# EAGLE board LinCorrector2 (EAGLE 7.4.0)
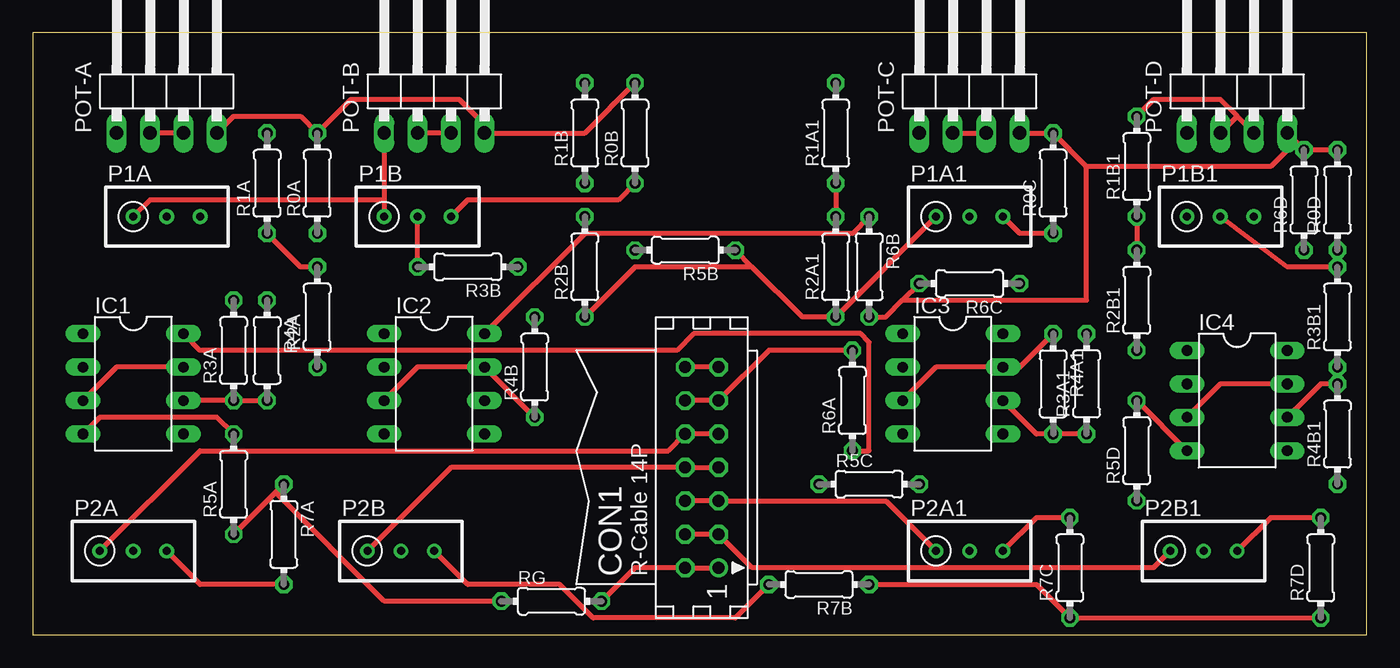
[diagram p0: board, top side]
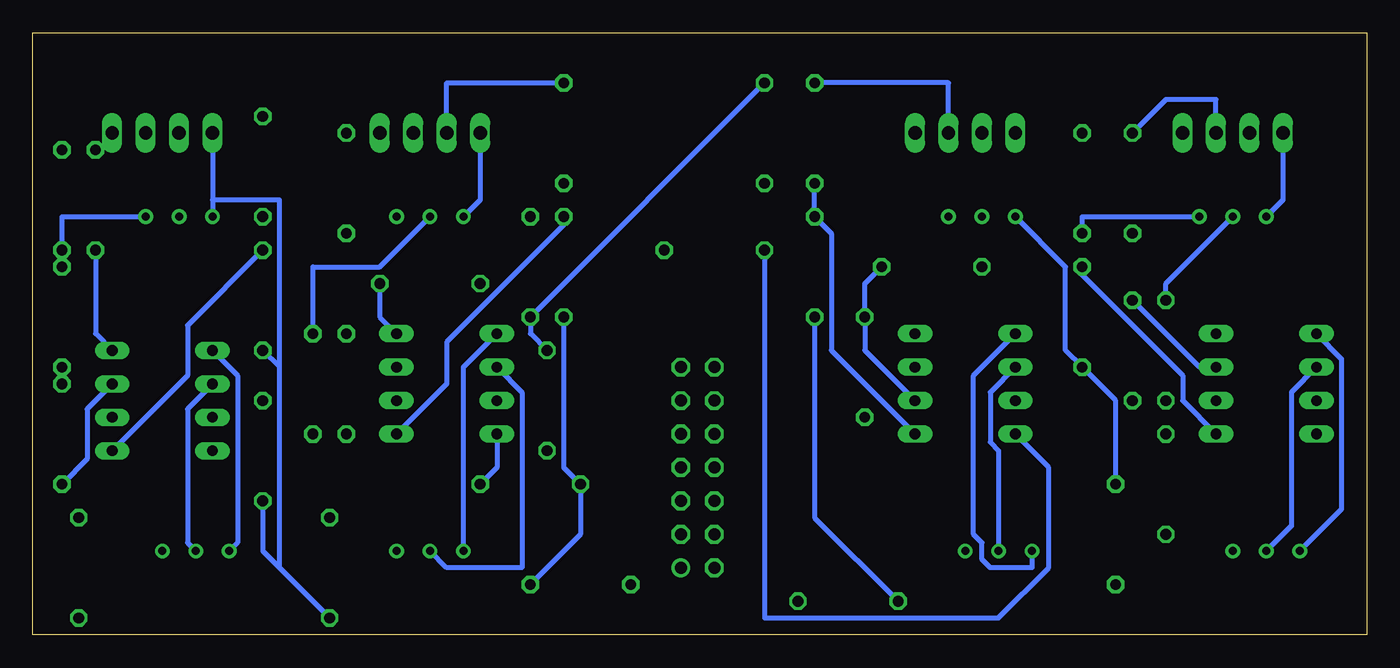
[diagram p1: board, bottom side, seen from below]

Size 101.27 x 45.71 mm. Coordinates in mm from the lower left corner, seen from the top.
Outline: 0,0 101.27,0 101.27,45.71 0,45.71 0,0
Copper layers (1*16): Top 0.035mm / dielectric 1.5mm / Bottom 0.035mm
Design rules "default": minimum track width 10mil, minimum drill 24mil, track to track 8mil, track to pad 8mil, pad to pad 8mil, via to via 8mil, smd to smd 8mil, copper to edge 40mil, drill to drill 8mil, minimum pad ring 10mil, minimum via ring 8mil, stop-mask expansion 4mil, vias tented up to drill 0mil, thermal gap 10mil
Net classes: 0 default: width 0.381 mm, drill 0.508 mm, clearance 0.381 mm

## Footprints (pad centres in the part's own frame; a part is rotated, then mirrored left to right if it is on the bottom)
CON14 = drill 0.914: 1 -7.62,-1.27 | drill 0.914 octagon: 2 -7.62,1.27; 3 -5.08,-1.27; 4 -5.08,1.27; 5 -2.54,-1.27; 6 -2.54,1.27; 7 0,-1.27; 8 0,1.27; 9 2.54,-1.27; 10 2.54,1.27; 11 5.08,-1.27; 12 5.08,1.27; 13 7.62,-1.27; 14 7.62,1.27
DIP-8 = drill 0.813 long: 1 -3.81,-3.81; 2 -1.27,-3.81; 3 1.27,-3.81; 4 3.81,-3.81; 5 3.81,3.81; 6 1.27,3.81; 7 -1.27,3.81; 8 -3.81,3.81
RTRIM3296W = drill 0.61: 1 0,-2.54; 2 0,0; 3 0,2.54
1X04/90 = drill 1.016 long: 1 -3.81,-3.81; 2 -1.27,-3.81; 3 1.27,-3.81; 4 3.81,-3.81
0204/7 = drill 0.813 octagon: 1 -3.81,0; 2 3.81,0

## Placement (x,y rotation side)
CON1  [CON14]  50.8,12.7 90 top
IC1  MCP6002DIP  [DIP-8]  7.62,19.05 270 top
IC2  MCP6002DIP  [DIP-8]  30.48,19.05 270 top
IC3  MCP6002DIP  [DIP-8]  69.85,19.05 270 top
IC4  MCP6002DIP  [DIP-8]  91.44,17.78 270 top
P1A  500k  [RTRIM3296W]  10.16,31.75 270 top
P1A1  500k  [RTRIM3296W]  71.12,31.75 270 top
P1B  500k  [RTRIM3296W]  29.21,31.75 270 top
P1B1  500k  [RTRIM3296W]  90.17,31.75 270 top
P2A  500k  [RTRIM3296W]  7.62,6.35 270 top
P2A1  500k  [RTRIM3296W]  71.12,6.35 270 top
P2B  500k  [RTRIM3296W]  27.94,6.35 270 top
P2B1  500k  [RTRIM3296W]  88.9,6.35 270 top
POT-A  [1X04/90]  10.16,41.91 0 top
POT-B  [1X04/90]  30.48,41.91 0 top
POT-C  [1X04/90]  71.12,41.91 0 top
POT-D  [1X04/90]  91.44,41.91 0 top
R0A  0  [0204/7]  21.59,34.29 90 top
R0B  0  [0204/7]  45.72,38.1 90 top
R0C  0  [0204/7]  77.47,34.29 90 top
R0D  0  [0204/7]  99.06,33.02 90 top
R1A  10k  [0204/7]  17.78,34.29 90 top
R1A1  10k  [0204/7]  60.96,38.1 90 top
R1B  10k  [0204/7]  41.91,38.1 90 top
R1B1  10k  [0204/7]  83.82,35.56 90 top
R2A  10k  [0204/7]  21.59,24.13 90 top
R2A1  10k  [0204/7]  60.96,27.94 90 top
R2B  10k  [0204/7]  41.91,27.94 90 top
R2B1  10k  [0204/7]  83.82,25.4 90 top
R3A  10k  [0204/7]  15.24,21.59 90 top
R3A1  10k  [0204/7]  80.01,19.05 90 top
R3B  10k  [0204/7]  33.02,27.94 180 top
R3B1  10k  [0204/7]  99.06,24.13 90 top
R4A  10k  [0204/7]  17.78,21.59 270 top
R4A1  10k  [0204/7]  77.47,19.05 270 top
R4B  10k  [0204/7]  38.1,20.32 90 top
R4B1  10k  [0204/7]  99.06,15.24 90 top
R5A  0  [0204/7]  15.24,11.43 90 top
R5B  0  [0204/7]  49.53,29.21 180 top
R5C  0  [0204/7]  63.5,11.43 0 top
R5D  0  [0204/7]  83.82,13.97 90 top
R6A  0  [0204/7]  62.23,17.78 90 top
R6B  0  [0204/7]  63.5,27.94 270 top
R6C  0  [0204/7]  71.12,26.67 180 top
R6D  0  [0204/7]  96.52,33.02 90 top
R7A  0  [0204/7]  19.05,7.62 270 top
R7B  0  [0204/7]  59.69,3.81 180 top
R7C  0  [0204/7]  78.74,5.08 90 top
R7D  0  [0204/7]  97.79,5.08 90 top
RG  0  [0204/7]  39.37,2.54 0 top

## Library data of the parts
CON1 = con-harting; OC_FARNELL: unknown; OC_NEWARK: unknown
IC1-IC4 = adam - ics
P1A P1A1 P1B P1B1 P2A P2A1 P2B P2B1 R0A R0B R0C R0D R5A R5B R5C R5D R6A R6B R6C R6D R7A R7B R7C R7D RG = resistor
POT-A POT-B POT-C POT-D = pinhead
R1A R1A1 R1B R1B1 R2A R2A1 R2B R2B1 R3A R3A1 R3B R3B1 R4A R4A1 R4B R4B1 = rcl

## Nets
GND: P1A1.1 P1A.1 P1B1.1 P1B.1 POT-A.1 POT-B.1 POT-C.1 POT-D.1 R2A1.1 R2A.1 R2B1.1 R2B.1 R5A.1 R5B.1 R5C.1 R5D.1 R7A.1 R7B.1 R7C.1 R7D.1 RG.1
N$1: IC1.5 R1A.1 R2A.2
N$2: POT-A.2 POT-A.3 R1A.2
N$3: P1A.2 R3A.2
N$4: IC1.6 R3A.1 R4A.2
N$5: IC1.3 IC1.7 R4A.1
N$6: IC2.5 R1B.1 R2B.2
N$7: IC1.2 P2A.2
N$8: CON1.9 CON1.10 IC1.1 P2A.1
N$9: P1B.2 R3B.2
N$10: IC2.6 R3B.1 R4B.2
N$11: IC2.3 IC2.7 R4B.1
N$12: IC2.2 P2B.2
N$13: CON1.7 CON1.8 IC2.1 P2B.1
N$14: POT-B.2 POT-B.3 R1B.2
N$15: IC3.5 R1A1.1 R2A1.2
N$16: P1A1.2 R3A1.2
N$17: IC3.6 R3A1.1 R4A1.2
N$18: IC3.3 IC3.7 R4A1.1
N$19: IC3.2 P2A1.2
N$20: CON1.5 CON1.6 IC3.1 P2A1.1
N$21: POT-C.2 POT-C.3 R1A1.2
N$22: IC4.5 R1B1.1 R2B1.2
N$23: P1B1.2 R3B1.2
N$24: IC4.6 R3B1.1 R4B1.2
N$25: IC4.3 IC4.7 R4B1.1
N$26: IC4.2 P2B1.2
N$27: P1A.3 R0A.1
N$28: POT-D.2 POT-D.3 R1B1.2
N$29: CON1.3 CON1.4 IC4.1 P2B1.1
N$30: P1B.3 R0B.1
N$31: P1A1.3 R0C.1
N$32: P1B1.3 R0D.1
N$33: IC1.8 R6A.1
N$34: IC1.4 R5A.2
N$35: IC2.8 R6B.1
N$36: IC3.8 R6C.1
N$37: IC4.8 R6D.1
N$38: IC2.4 R5B.2
N$39: IC3.4 R5C.2
N$40: IC4.4 R5D.2
N$42: P2A.3 R7A.2
N$43: P2B.3 R7B.2
N$44: P2A1.3 R7C.2
N$45: P2B1.3 R7D.2
N$46: CON1.1 CON1.2 RG.2
N$47: CON1.13 CON1.14
VCC: CON1.11 CON1.12 POT-A.4 POT-B.4 POT-C.4 POT-D.4 R0A.2 R0B.2 R0C.2 R0D.2 R6A.2 R6B.2 R6C.2 R6D.2

## Tracks (layer width: path | path; a pad name or v marks a point on that pad's centre or on a via)
GND
  Top 0.381: R7D.1 R7C.1 76.2,3.81 R7B.1 | POT-B.1 26.67,33.02 | 26.67,33.02 P1B.1 | R7A.1 18.41,10.79 | 18.41,10.79 R5A.1 | P1A.1 8.89,33.02 26.67,33.02 | 54.61,27.94 58.42,24.13 R2A1.1 P1A1.1 | 54.61,27.94 R5B.1 | R2B.1 45.72,27.94 54.61,27.94 | 18.41,10.79 26.67,2.54 RG.1
  Bottom 0.381: 87.63,33.02 P1B1.1 | POT-D.1 87.63,33.02 | 82.55,5.08 83.82,6.35 R5D.1 | 82.55,5.08 R7C.1 | 82.55,20.32 R2B1.1 | 82.55,5.08 82.55,20.32 | 87.63,33.02 82.55,33.02 82.55,20.32 | P1A.1 6.35,33.02 POT-A.1 | R7A.1 19.05,17.78 R2A.1 22.86,21.59 22.86,27.94 P1B.1 | RG.1 41.91,8.89 R2B.1 | P1A1.1 67.31,33.02 POT-C.1 | R2A1.1 60.96,12.7 R5C.1 59.69,7.62 R7B.1
N$1
  Top 0.381: R1A.1 20.32,27.94 R2A.2
  Bottom 0.381: IC1.5 13.97,17.78 13.97,19.68 21.59,27.3 R2A.2
N$2
  Top 0.381: POT-A.3 POT-A.2
  Bottom 0.381: R1A.2 15.24,40.64 11.43,40.64 POT-A.3
N$3
  Bottom 0.381: P1A.2 15.24,26.67 R3A.2
N$4
  Top 0.381: IC1.6 R3A.1 R4A.2
N$5
  Top 0.381: IC1.3 6.35,20.32 IC1.7
  Bottom 0.381: R4A.1 12.7,20.32 IC1.7
N$6
  Bottom 0.381: IC2.5 40.64,21.59 40.64,30.48 R2B.2 R1B.1
N$7
  Bottom 0.381: P2A.2 5.71,8.26 5.71,18.41 IC1.2
N$8
  Top 0.381: CON1.9 CON1.10 48.26,13.97 12.7,13.97 P2A.1
  Bottom 0.381: P2A.1 1.91,9.53 1.91,20.95 IC1.1
N$9
  Top 0.381: R3B.2 P1B.2
N$10
  Bottom 0.381: IC2.6 38.1,21.59 R4B.2 38.1,26.67 R3B.1
N$11
  Top 0.381: IC2.3 29.21,20.32 IC2.7 R4B.1
N$12
  Bottom 0.381: P2B.2 27.94,13.97 28.57,14.61 28.57,18.41 IC2.2
N$13
  Top 0.381: P2B.1 31.75,12.7 CON1.8 CON1.7
  Bottom 0.381: IC2.1 29.84,19.68 29.84,7.62 29.21,6.99 29.21,5.71 28.57,5.08 25.4,5.08 P2B.1
N$14
  Top 0.381: POT-B.3 POT-B.2
  Bottom 0.381: R1B.2 31.75,41.91 POT-B.3
N$15
  Top 0.381: R1A1.1 R2A1.2
  Bottom 0.381: IC3.5 69.85,19.05 69.85,22.23 60.96,31.11 R2A1.2
N$16
  Bottom 0.381: P1A1.2 74.93,27.94 80.01,27.94 R3A1.2
N$17
  Top 0.381: R3A1.1 R4A1.2 76.2,15.24 IC3.6
N$18
  Top 0.381: IC3.3 68.58,20.32 IC3.7 74.93,20.32 R4A1.1
N$19
  Bottom 0.381: P2A1.2 69.85,5.08 64.14,5.08 64.14,18.41 IC3.2
N$20
  Top 0.381: P2A1.1 64.77,10.16 CON1.5 CON1.6
  Bottom 0.381: IC3.1 68.58,20.32 P2A1.1
N$21
  Top 0.381: POT-C.2 POT-C.3
  Bottom 0.381: R1A1.2 69.85,41.91 POT-C.2
N$22
  Top 0.381: R1B1.1 R2B1.2
  Bottom 0.381: IC4.5 89.53,19.68 89.53,23.5 R2B1.2
N$23
  Top 0.381: P1B1.2 95.25,27.94 R3B1.2
N$24
  Top 0.381: IC4.6 97.79,19.05 R4B1.2 R3B1.1
N$25
  Top 0.381: IC4.3 90.17,19.05 IC4.7
  Bottom 0.381: R4B1.1 97.16,13.34 97.16,17.14 IC4.7
N$26
  Bottom 0.381: P2B1.2 89.53,6.99 89.53,17.14 IC4.2
N$27
  Bottom 0.381: P1A.3 21.59,31.75 R0A.1
N$28
  Top 0.381: R1B1.2 85.09,40.64 90.17,40.64 91.44,39.37 | POT-D.3 91.44,39.37 | 91.44,39.37 POT-D.2
N$29
  Top 0.381: CON1.4 CON1.3 54.61,5.08 85.09,5.08 P2B1.1
  Bottom 0.381: P2B1.1 85.72,6.99 85.72,19.68 IC4.1
N$30
  Top 0.381: P1B.3 33.02,33.02 44.45,33.02 R0B.1
N$31
  Top 0.381: P1A1.3 74.93,30.48 R0C.1
N$32
  Bottom 0.381: P1B1.3 99.06,31.75 R0D.1
N$33
  Top 0.381: IC1.8 12.7,21.59 48.9,21.59 50.16,22.86 62.87,22.86 63.5,22.23 63.5,13.97 R6A.1
N$34
  Top 0.381: IC1.4 5.08,16.51 13.97,16.51 R5A.2
N$35
  Top 0.381: IC2.8 41.91,30.48 62.23,30.48 R6B.1
N$36
  Bottom 0.381: IC3.8 74.93,24.13 R6C.1
N$37
  Bottom 0.381: IC4.8 96.52,22.86 R6D.1
N$38
  Bottom 0.381: IC2.4 24.13,12.7 24.13,5.08 27.94,1.27 45.72,1.27 R5B.2
N$39
  Bottom 0.381: R5C.2 66.04,12.7 IC3.4
N$40
  Top 0.381: R5D.2 IC4.4
N$42
  Top 0.381: P2A.3 12.7,3.81 R7A.2
N$43
  Top 0.381: P2B.3 33.02,3.81 40.01,3.81 42.55,1.27 53.34,1.27 R7B.2
N$44
  Top 0.381: P2A1.3 76.2,8.89 R7C.2
N$45
  Top 0.381: P2B1.3 93.98,8.89 R7D.2
N$46
  Top 0.381: RG.2 45.72,5.08 CON1.2 CON1.1
N$47
  Top 0.381: CON1.13 CON1.14
VCC
  Top 0.381: POT-A.4 15.24,39.37 20.32,39.37 R0A.2 24.13,40.64 32.38,40.64 34.92,38.1 | R0B.2 41.91,38.1 34.92,38.1 | 34.92,38.1 POT-B.4 | POT-C.4 R0C.2 80.01,35.56 | 95.89,37.47 R6D.2 R0D.2 | 80.01,35.56 93.98,35.56 95.89,37.47 | 95.89,37.47 POT-D.4 | CON1.12 CON1.11 55.88,21.59 R6A.2 | 66.04,25.4 64.77,24.13 R6B.2 | 66.04,25.4 R6C.2 | 80.01,35.56 80.01,25.4 66.04,25.4
  Bottom 0.381: R6A.2 63.5,22.86 R6B.2 R0B.2